# Altium PCB Electronica_Aplicada_II_TP1.PcbDoc
Units mm, origin at the board's own origin, x right, y up, seen from the top; angles counter-clockwise.
Board outline 100 x 80 mm, 2 copper layers (Top Layer, Bottom Layer); 24 components, 14 nets, 54 pads, 0 vias.
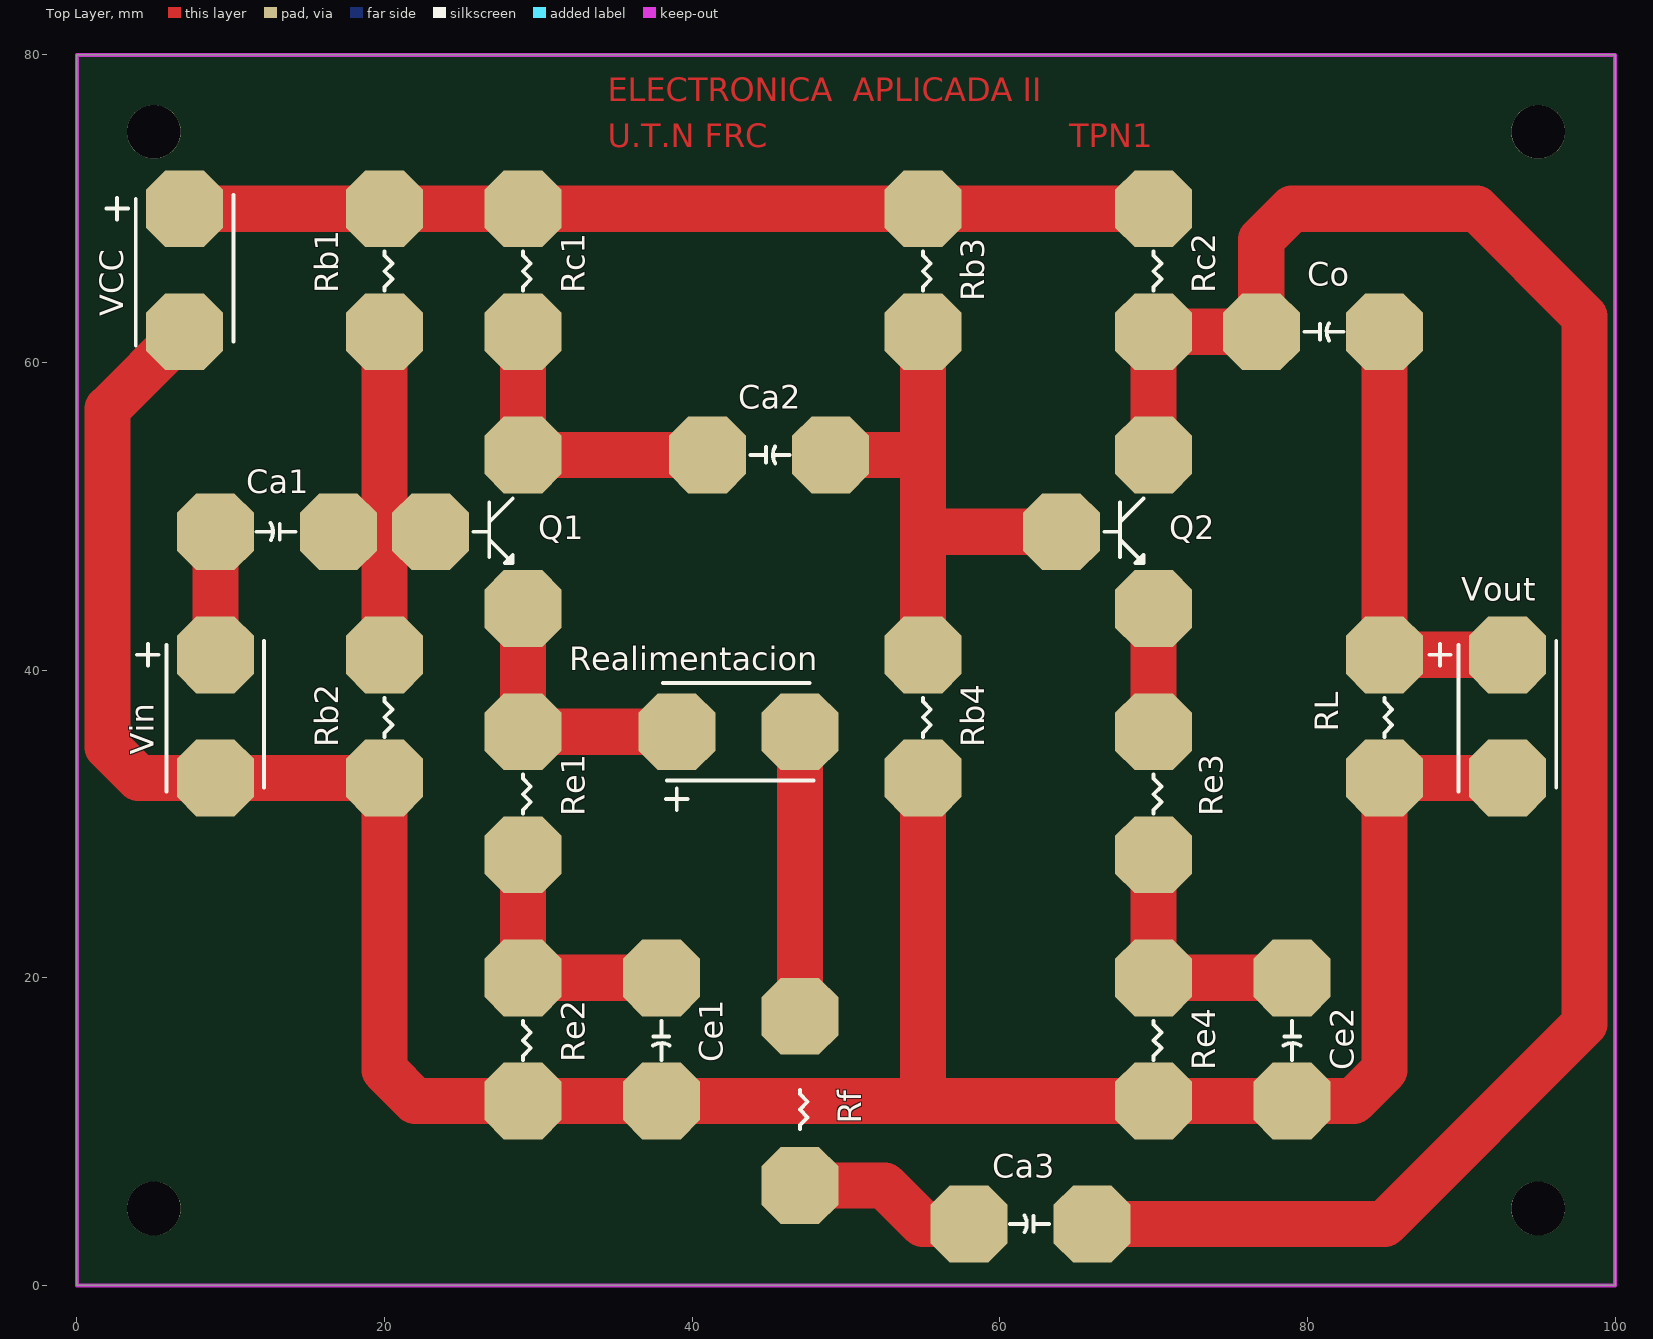
[diagram p0: Top Layer view]
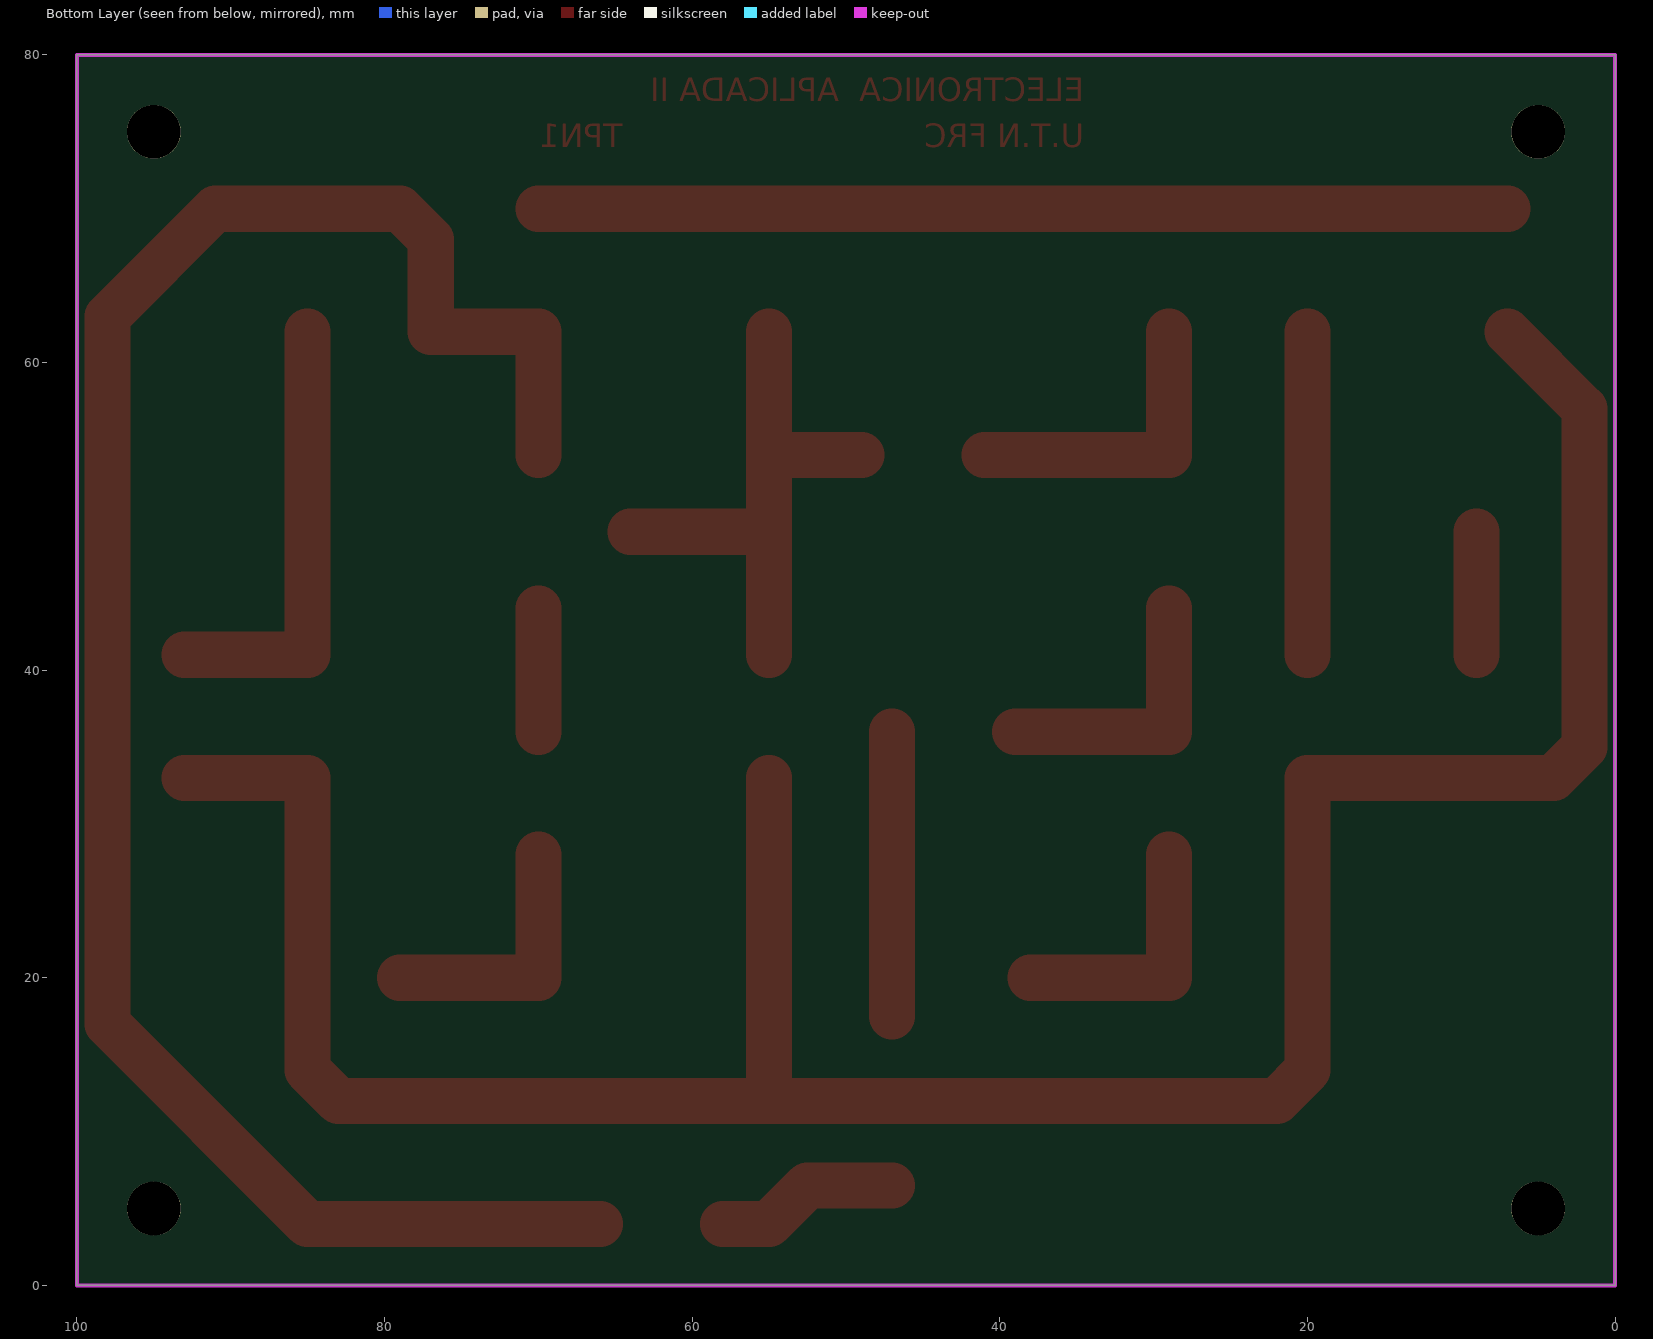
[diagram p1: Bottom Layer view, seen from below]

## Layer stack, top to bottom
Top Solder: solder mask 0.0102, Solder Resist, Dk 3.5
Top Layer: signal copper 0.0356
Dielectric 1: dielectric 0.32, FR-4, Dk 4.8
Bottom Layer: signal copper 0.0356
Bottom Solder: solder mask 0.0102, Solder Resist, Dk 3.5

## Board outline
0,0 0,80 100,80 100,0

## Design rules (kind name [scope] priority, off if disabled: settings)
Clearance [All] p1: gap=0.254 ignorepadtopadclearanceinfootprint=FALSE
PolygonConnect [All] p1: connectstyle=Relief reliefconductorwidth=0.254 reliefentries=4 polygonreliefangle="90 Angle" airgapwidth=0.254
RoomDefinition Electronica_Aplicada_II_TP1 [InComponentClass('Electronica_Aplicada_II_TP1')] p1: confinementstyle=ConfineIn formatcopy=TRUE lockcomponents=FALSE outline -25.4,-25.4 25.4,-25.4 25.4,0 -25.4,0
RoutingVias [All] p1: holewidth=0.711 width=1.27 viastyle="Through Hole" minholewidth=0.711 minwidth=1.27 maxholewidth=0.711 maxwidth=1.27
SolderMaskExpansion [All] p1: expansion=0.102
Width [All] p1: maxlimit=5 minlimit=0.254 preferedwidth=3 bottomlayer_minwidth=1 minimp=50.000000 maximp=50.000000 favimp=50.000000
30 further rules are at their usual default settings.

## Components (designator, comment, footprint, x,y, rotation, side; value= is the part's Value field where it differs from the comment)
Ca1 "Cap Pol1" PAD_GEN_C 9,49 r90 top value=10uF
Ca2 "Cap Pol1" PAD_GEN_C 49,54 r270 top value=10uF
Ca3 "Cap Pol1" PAD_GEN_C 58,4 r90 top value=10uF
Ce1 "Cap Pol1" PAD_GEN_C 38,12 r180 top value=10uF
Ce2 "Cap Pol1" PAD_GEN_C 79,12 r180 top value=10uF
Co "Cap Pol1" PAD_GEN_C 85,62 r270 top value=10uF
Q1 "NPN" "PAD_GEN - TX" 23,49 r0 top
Q2 "NPN" "PAD_GEN - TX" 64,49 r0 top
Rb1 "Res1" PAD_GEN_R#1 20,62 r180 top value=1K
Rb2 "Res1" PAD_GEN_R#1 20,33 r180 top value=1K
Rb3 "Res1" PAD_GEN_R#1 55,62 r180 top value=1K
Rb4 "Res1" PAD_GEN_R#1 55,33 r180 top value=1K
Rc1 "Res1" PAD_GEN_R#1 29,62 r180 top value=1K
Rc2 "Res1" PAD_GEN_R#1 70,62 r180 top value=1K
Re1 "Res1" PAD_GEN_R#1 29,28 r180 top value=1K
Re2 "Res1" PAD_GEN_R#1 29,12 r180 top value=1K
Re3 "Res1" PAD_GEN_R#1 70,28 r180 top value=1K
Re4 "Res1" PAD_GEN_R#1 70,12 r180 top value=1K
Realimentacion "Header 2" PAD_GEN 47,36 r270 top
Rf "Res1" PAD_GEN_R#2 47,7.5 r180 top value=1K
RL "Res1" PAD_GEN_R#1 85,33 r180 top value=1K
VCC "Header 2" PAD_GEN 7,62 r180 top
Vin "Header 2" PAD_GEN 9,33 r180 top
Vout "Header 2" PAD_GEN 93,33 r180 top

## Footprints (in the part's own frame and the unit in brackets; to place one, negate y for a bottom-side part, rotate by r counter-clockwise, add the part's x,y. Pads: shape width x height; smd on the part's side, far side on the other; paste and mask are expansions set on the pad)
PAD_GEN [mm]
  oct 5x5 smd: 1(0,0) 2(0,-8)
  silkscreen extent -3.17,-8.89 5.08,0.89
"PAD_GEN - TX" [mm]
  oct 5x5 smd: 1(6,5) 2(0,0) 3(6,-5)
  silkscreen extent 2.79,-2.03 5.33,2.16
PAD_GEN_C [mm]
  oct 5x5 smd: 1(0,-8) 2(0,0)
  silkscreen extent -0.54,-5.21 0.56,-2.67
PAD_GEN_R#1 [mm]
  oct 5x5 smd: 1(0,0) 2(0,-8)
  silkscreen extent -0.51,-5.21 0,-2.67
PAD_GEN_R#2 [mm]
  oct 5x5 smd: 1(0,1) 2(0,-10)
  silkscreen extent -0.51,-5.21 0,-2.67

## Part data
Ca1 Ca2 Ca3 Ce1 Ce2 Co: "Polarized Capacitor (Radial)", LatestRevisionDate=17-Jul-2002, LatestRevisionNote="Re-released for DXP Platform.", PackageDescription="Polarized Capacitor (Radial); 2 Leads", PackageReference=RB7.6-15, Published=8-Jun-2000, Publisher="Altium Limited"
Q1 Q2: "NPN Bipolar Transistor", Code_JEDEC=TO-226-AA, LatestRevisionDate=17-Jul-2002, LatestRevisionNote="Re-released for DXP Platform.", PackageDescription="TO, Flat Index; 3 In-Line, Axial Leads; Body Dia. 4.8mm; Leads 0.55 x 0.51 mm (max)", PackageReference=TO-226-AA, Published=8-Jun-2000, Publisher="Altium Limited"
Rb1 Rb2 Rb3 Rb4 Rc1 Rc2 Re1 Re2 Re3 Re4 Rf RL: "Resistor", LatestRevisionDate=17-Jul-2002, LatestRevisionNote="Re-released for DXP Platform.", PackageDescription="Axial Device, Thru-Hole; 2 Leads; 0.3 in Pin Spacing", PackageReference=AXIAL-0.3, Published=8-Jun-2000, Publisher="Altium Limited"
Realimentacion VCC Vin Vout: "Header, 2-Pin", LatestRevisionDate=17-Jul-2002, LatestRevisionNote="Re-released for DXP Platform.", Publisher="Altium Limited"

## Free pads (board coordinates)
  round 3.5 hole 3.5: 2(5,5) 3(5,75) 3(95,5) 3(95,75)

## Nets (pads, with @x,y where several pads share a name; then routed paths per layer and width w, separated by ;. In a path a pad name is that pad's centre, name@x,y a point inside that pad or via, vN(x,y) a via of type N, cw(c..) or ccw(c..) an arc to the next point about the centre after c; other vN are vias at no path point)
GND: Ce1.2 Ce2.2 Rb2.1 Rb4.1 Re2.1 Re4.1 RL.1 VCC.1 Vin.1 Vout.1 | length 181.6
  Top Layer w3: VCC.1 2,57 2,35 4,33 Vin.1 Rb2.1 20,14 22,12 55,12 ; Rb4.1 55,12 ; Vout.1 RL.1 85,14 83,12 78,12 Re4.1 55,12
NetCa1_1: Ca1.1 Q1.2 Rb1.1 Rb2.2 | length 21
  Top Layer w3: Rb2.2 Rb1.1
NetCa1_2: Ca1.2 Vin.2 | length 8
  Top Layer w3: Vin.2 Ca1.2
NetCa2_1: Ca2.1 Q1.1 Rc1.1 | length 20
  Top Layer w3: Rc1.1 Q1.1 Ca2.1
NetCa2_2: Ca2.2 Q2.2 Rb3.1 Rb4.2 | length 36
  Top Layer w3: Ca2.2 55,54 ; Rb4.2 55,49 ; Rb3.1 55,54 ; Q2.2 55,49 ; 55,49 55,54
NetCa3_1: Ca3.1 Co.1 Q2.1 Rc2.1 | length 129.1
  Top Layer w3: Ca3.1 85,4 98,17 98,63 91,70 79,70 77,68 Co.1 Rc2.1 Q2.1
NetCa3_2: Ca3.2 Rf.1 | length 12
  Top Layer w3: Rf.1 52.5,6.5 55,4 Ca3.2
NetCe1_1: Ce1.1 Re1.1 Re2.2 | length 17
  Top Layer w3: Re1.1 Re2.2 Ce1.1
NetCe2_1: Ce2.1 Re3.1 Re4.2 | length 17
  Top Layer w3: Re3.1 Re4.2 Ce2.1
NetCo_2: Co.2 RL.2 Vout.2 | length 29
  Top Layer w3: Co.2 RL.2 Vout.2
NetQ1_3: Q1.3 Re1.2 Realimentacion.2 | length 18
  Top Layer w3: Q1.3 Re1.2 Realimentacion.2
NetQ2_3: Q2.3 Re3.2 | length 8
  Top Layer w3: Re3.2 Q2.3
NetRealimentacion_1: Realimentacion.1 Rf.2 | length 18.5
  Top Layer w3: Rf.2 Realimentacion.1
Vcc: Rb1.2 Rb3.2 Rc1.2 Rc2.2 VCC.2 | length 63
  Top Layer w3: VCC.2 Rb1.2 32,70 Rb3.2 Rc2.2

## Keep-outs
Keep-Out Layer:
  the board outline again, w0.254

## Other copper
Top Layer:
  text "ELECTRONICA  APLICADA II" at 34.5,77 h1.52
  text "U.T.N FRC" at 34.5,74 h1.52
  text "TPN1" at 64.5,74 h1.52

## Silkscreen, mask and mechanical layers (free items; w line width, h text height)
Mechanical 1:
  the board outline again, w0.254